# EAGLE board Trial_1_ECE411_Group_15_UPDATED (EAGLE 9.2.1)
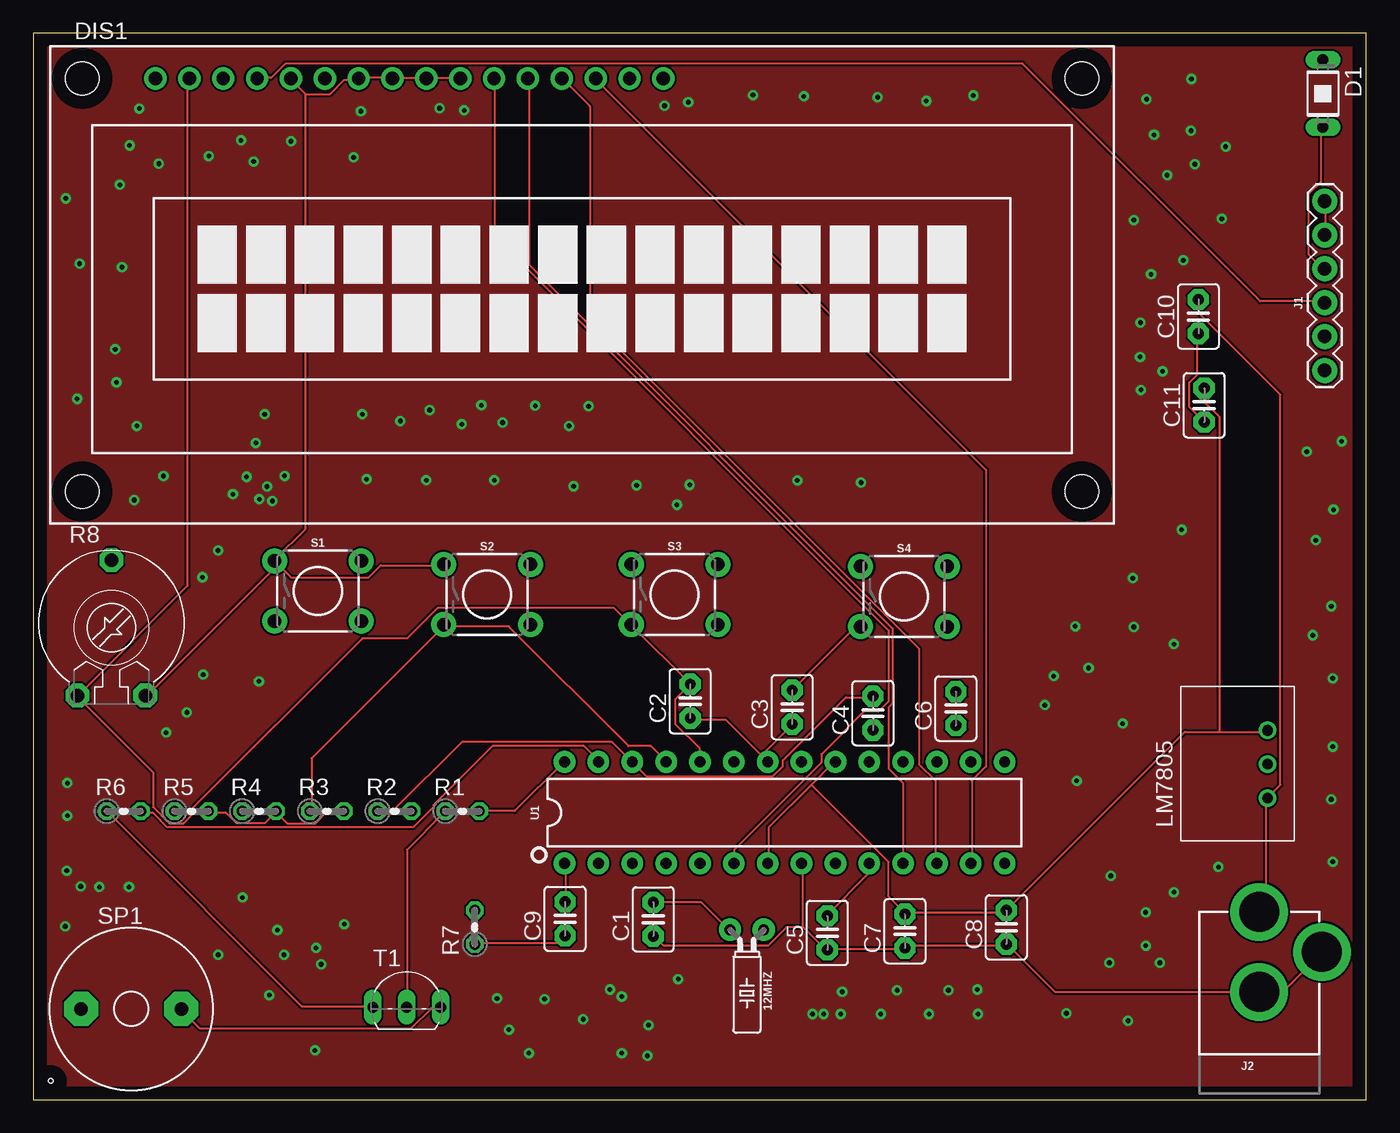
[diagram p0: board, top side]
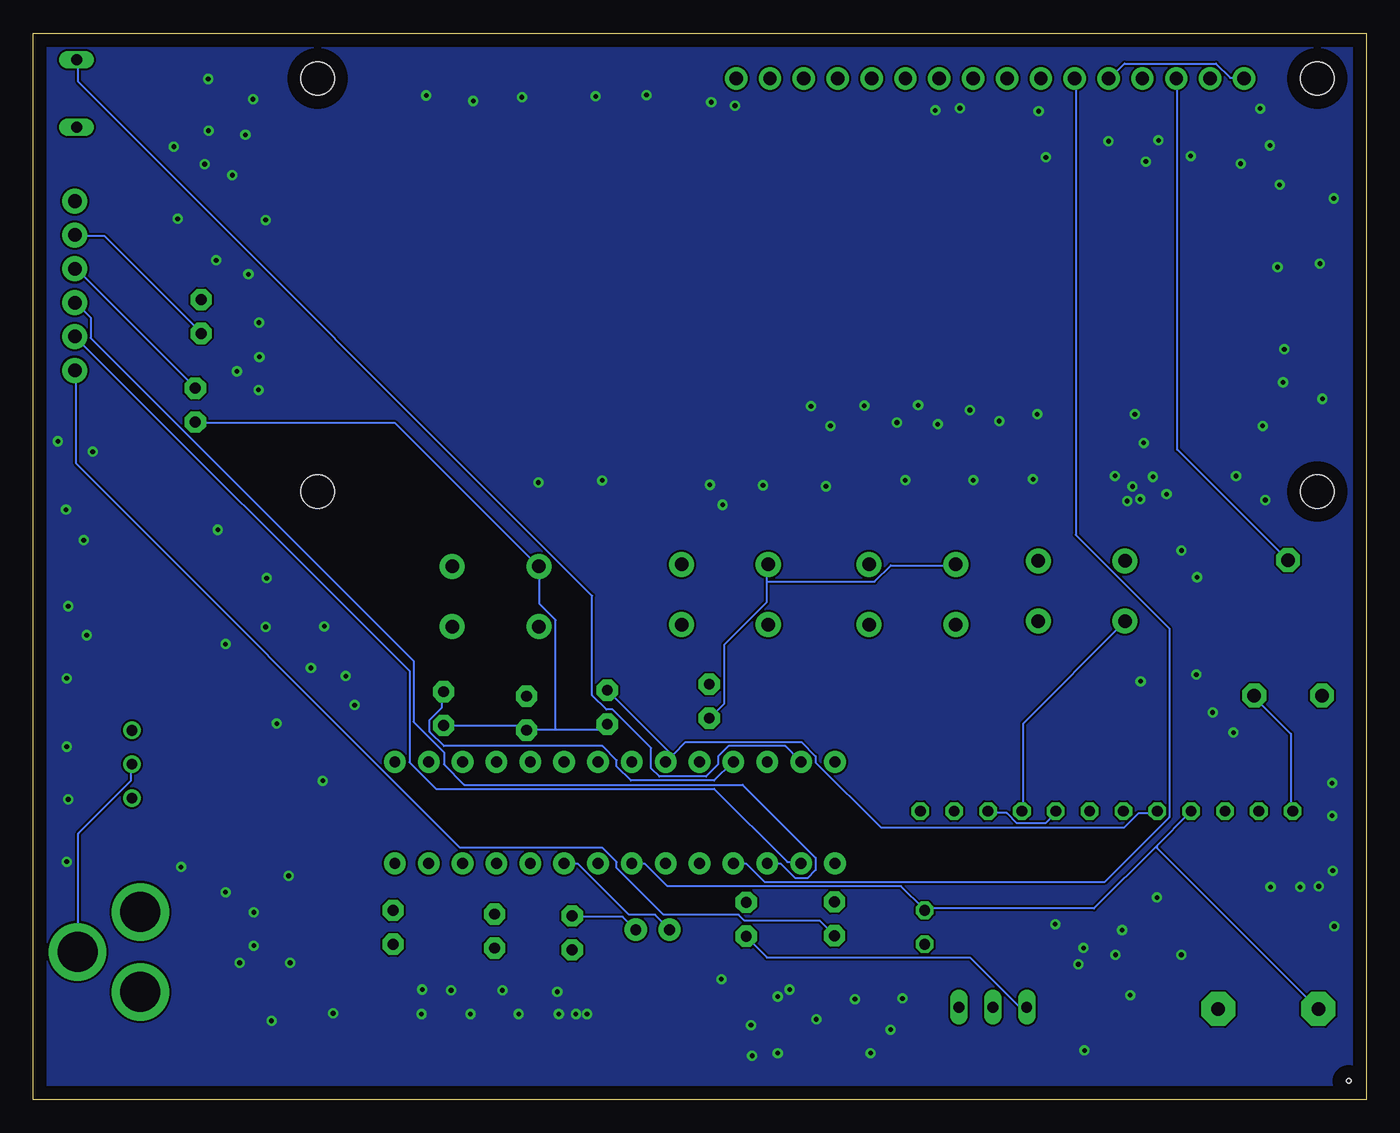
[diagram p1: board, bottom side, seen from below]

Size 100 x 80 mm. Coordinates in mm from the lower left corner, seen from the top.
Outline: 0,0 100,0 100,80 0,80 0,0
Copper layers (1*16): Top 0.035mm / dielectric 1.5mm / Bottom 0.035mm
Design rules "default": minimum track width 6mil, minimum drill 0.35mm, track to track 6mil, track to pad 6mil, pad to pad 6mil, via to via 6mil, smd to smd 6mil, copper to edge 40mil, drill to drill 6mil, minimum pad ring 10mil, minimum via ring 8mil, stop-mask expansion 4mil, vias tented up to drill 0mil, thermal gap 10mil
Holes 0.35 mm at 1.31,1.39

## Footprints (pad centres in the part's own frame; a part is rotated, then mirrored left to right if it is on the bottom)
CRYSTAL-PTH-2X6-CYL = drill 0.813 pad 1.676: 1 -1.27,0; 2 1.27,0
C2.5-3 = drill 0.813 pad 1.6 octagon: 1 -1.27,0; 2 1.27,0
BPW32 = drill 0.813 long: A 0,2.54; K 0,-2.54
TUXGR_16X2_R2 = drill 1 pad 1.676: 1 -32,15.5; 2 -29.46,15.5; 3 -26.92,15.5; 4 -24.38,15.5; 5 -21.84,15.5; 6 -19.3,15.5; 7 -16.76,15.5; 8 -14.22,15.5; 9 -11.68,15.5; 10 -9.14,15.5; 11 -6.6,15.5; 12 -4.06,15.5; 13 -1.52,15.5; 14 1.02,15.5; 15 3.56,15.5; 16 6.1,15.5 | hole 2.5: -37.5,-15.5; 37.5,-15.5; -37.5,15.5; 37.5,15.5
FTDI_BASIC = drill 1.016 pad 1.88: CTS 10.16,0; DTR 0,0; GND 12.7,0; RXI 2.54,0; TXO 5.08,0; VCC 7.62,0
POWER_JACK_PTH = drill 2.997 pad 4.318: GND 0,7.7; GNDBREAK 4.7,10.7; PWR 0,13.7
DC-DC_CONVERTER_78XX = drill 0.8: GND 0,0; VIN -2.54,0; VOUT 2.54,0
0204V = drill 0.813 octagon: 1 -1.27,0; 2 1.27,0
PT-10 = drill 1.016 pad 1.778 octagon: 1 -2.54,-5.08; 2 2.54,-5.08; 3 0,5.08
TACTILE_SWITCH_PTH_6.0MM = drill 1.016 pad 1.88: 1 -3.251,2.261; 2 3.251,2.261; 3 -3.251,-2.261; 4 3.251,-2.261
AL60P = drill 1.016 pad 2.54 octagon: 1 -3.759,0; 2 3.759,0
TO92-EBC-OVAL = drill 0.813 long: B 0,-1.27; C 2.54,-1.27; E -2.54,-1.27
DIP28 = drill 0.813 pad 1.626: 1 -16.51,-3.81; 2 -13.97,-3.81; 3 -11.43,-3.81; 4 -8.89,-3.81; 5 -6.35,-3.81; 6 -3.81,-3.81; 7 -1.27,-3.81; 8 1.27,-3.81; 9 3.81,-3.81; 10 6.35,-3.81; 11 8.89,-3.81; 12 11.43,-3.81; 13 13.97,-3.81; 14 16.51,-3.81; 15 16.51,3.81; 16 13.97,3.81; 17 11.43,3.81; 18 8.89,3.81; 19 6.35,3.81; 20 3.81,3.81; 21 1.27,3.81; 22 -1.27,3.81; 23 -3.81,3.81; 24 -6.35,3.81; 25 -8.89,3.81; 26 -11.43,3.81; 27 -13.97,3.81; 28 -16.51,3.81

## Placement (x,y rotation side)
12MHZ  [CRYSTAL-PTH-2X6-CYL]  53.54,12.74 180 top
C1  18p  [C2.5-3]  46.52,13.52 90 top
C2  100n  [C2.5-3]  49.28,29.89 90 top
C3  100n  [C2.5-3]  56.94,29.44 90 top
C4  100n  [C2.5-3]  63,28.99 90 top
C5  18p  [C2.5-3]  59.57,12.51 90 top
C6  100n  [C2.5-3]  69.22,29.34 90 top
C7  0.1u  [C2.5-3]  65.39,12.64 90 top
C8  0.1u  [C2.5-3]  73,12.92 90 top
C9  0.1u  [C2.5-3]  39.89,13.56 90 top
C10  0.1u  [C2.5-3]  87.41,58.75 90 top
C11  0.1u  [C2.5-3]  87.85,52.1 90 top
D1  BPW32  [BPW32]  96.75,75.48 180 top
DIS1  TUXGR_16X2_R2  [TUXGR_16X2_R2]  41.17,61.12 0 top
J1  6_PIN_SERIAL_CABLEPTH  [FTDI_BASIC]  96.89,54.71 90 top
J2  POWER_JACK  [POWER_JACK_PTH]  91.98,0.38 0 top
LM7805  R-78E5.0-1.0  [DC-DC_CONVERTER_78XX]  92.61,25.16 90 top
R1  220  [0204V]  32.18,21.63 0 top
R2  10k  [0204V]  27.1,21.63 0 top
R3  10k  [0204V]  22.02,21.63 0 top
R4  10k  [0204V]  16.94,21.63 0 top
R5  10k  [0204V]  11.86,21.63 0 top
R6  1k  [0204V]  6.78,21.63 0 top
R7  10k  [0204V]  33.12,12.92 90 top
R8  10k  [PT-10]  5.86,35.4 0 top
S1  MOMENTARY-SWITCH-SPST-PTH-6.0MM  [TACTILE_SWITCH_PTH_6.0MM]  21.35,38.16 0 top
S2  MOMENTARY-SWITCH-SPST-PTH-6.0MM  [TACTILE_SWITCH_PTH_6.0MM]  34.05,37.89 0 top
S3  MOMENTARY-SWITCH-SPST-PTH-6.0MM  [TACTILE_SWITCH_PTH_6.0MM]  48.11,37.89 0 top
S4  MOMENTARY-SWITCH-SPST-PTH-6.0MM  [TACTILE_SWITCH_PTH_6.0MM]  65.32,37.74 0 top
SP1  SPEAKER/AL60P  [AL60P]  7.34,6.8 0 top
T1  2N2222  [TO92-EBC-OVAL]  28.01,8.19 0 top
U1  328P  [DIP28]  56.37,21.53 0 top

## Library data of the parts
12MHZ = SparkFun-Clocks
C1-C11 = capacitor-wima
D1 = opto-trans-siemens; OC_FARNELL: unknown; OC_NEWARK: unknown
DIS1 = display-lcd; OC_FARNELL: unknown; OC_NEWARK: unknown
J1 = SparkFun-Connectors
J2 = SparkFun-Connectors; PROD_ID: CONN-08197
LM7805 = SparkFun-IC-Power; PROD_ID: COM-13655
R1-R7 = rcl; SPICEPREFIX: R
R8 = rcl; SPICEMODEL: POT; SPICEPREFIX: X
S1-S4 = SparkFun-Switches; PROD_ID: SWCH-08441; SF_SKU: COM-00097
SP1 T1 = adafruit
U1 = SparkFun-IC-Microcontroller; PROD_ID: IC-09136

## Nets
0: C1.1 C2.1 C3.1 C4.1 C5.1 C6.1 C7.1 C8.1 C10.1 C11.1 DIS1.1 DIS1.5 DIS1.7 DIS1.8 DIS1.9 DIS1.10 J1.CTS J1.GND J2.GND J2.GNDBREAK LM7805.GND R6.1 R8.2 S1.1 S2.1 S3.1 S4.1 T1.E U1.8 U1.22
ADC0: C3.2 R4.1 S4.3 U1.23
ADC1: C2.2 R5.1 S3.3 U1.24
ADC2: C6.2 R3.1 S2.3 U1.25
ADC3: C4.2 R2.1 S1.3 U1.26
N$1: 12MHZ.2 C1.2 U1.9
N$2: 12MHZ.1 C5.2 U1.10
N$3: SP1.2 T1.C
N$4: R1.1 T1.B
N$6: C10.2 J2.PWR LM7805.VIN
N$7: J1.RXI U1.2
N$9: DIS1.4 J1.TXO U1.3
N$11: DIS1.3 R8.3
N$13: DIS1.11 U1.6
N$14: DIS1.12 U1.11
N$15: DIS1.13 U1.12
N$16: DIS1.14 U1.13
N$17: D1.K R6.2 U1.27
N$18: R1.2 U1.28
N$20: C9.1 J1.DTR R7.1
N$23: DIS1.6 U1.4
N$24: C9.2 U1.1
VCC: C7.2 C8.2 C11.2 D1.A DIS1.2 J1.VCC LM7805.VOUT R2.2 R3.2 R4.2 R5.2 R7.2 R8.1 SP1.1 U1.7 U1.20

## Tracks (layer width: path | path; a pad name or v marks a point on that pad's centre or on a via)
0
  Top 0.152: J2.GNDBREAK 96.62,10.97 93.73,8.08 92.05,8.08 J2.GND 91.9,8.08 76.66,8.08 73.15,11.58 C8.1 73,11.58 65.68,11.58 65.53,11.43 C7.1 65.38,11.28 59.59,11.28 C5.1 59.44,11.28 57.76,12.95 | 57.76,12.95 57.76,17.68 U1.8 | 57.76,12.95 56.54,12.95 55.17,11.58 47.24,11.58 46.63,12.19 C1.1 | DIS1.10 32,76.66 29.57,76.66 DIS1.9 29.41,76.66 26.98,76.66 DIS1.8 26.82,76.66 24.54,76.66 DIS1.7 24.38,76.5 23.32,76.5 22.25,75.44 20.42,75.44 | 20.42,75.44 19.36,76.5 DIS1.5 | 18.29,40.23 18.14,40.39 S1.1 | 18.29,40.23 19.36,39.17 25.15,39.17 26.06,40.08 30.79,40.08 S2.1 | 18.29,40.23 18.29,40.08 8.53,30.33 R8.2 | 18.29,40.23 S1.1 | 20.42,75.44 20.42,42.82 18.14,40.54 S1.1 | J1.CTS 96.93,64.92 96.93,67.36 J1.GND | C10.1 87.33,57.45 87.33,54.41 86.72,53.8 86.72,51.97 87.78,50.9 C11.1 | 54.56,25.91 55.02,25.45 U1.22 54.56,25.91 | 54.56,25.91 51.97,28.5 49.38,28.5 C2.1 | 54.56,25.91 54.71,25.91 56.84,28.04 C3.1 | T1.E 25.45,7.01 20.12,7.01 5.64,21.49 R6.1
  Bottom 0.152: LM7805.GND 92.66,25.15 92.66,23.93 96.62,19.96 96.62,11.12 J2.GNDBREAK | T1.E 25.6,7.01 26.06,7.01 29.72,10.67 44.96,10.67 46.48,12.19 C1.1 | DIS1.1 9.3,76.66 10.21,76.66 11.28,77.72 18.14,77.72 19.2,76.66 DIS1.5 | R6.1 5.64,21.64 5.64,27.43 8.38,30.18 R8.2 | J1.CTS 96.77,64.77 94.64,64.77 87.48,57.61 C10.1 | 60.81,27.74 57.3,27.74 57,28.04 C3.1 | 60.81,27.74 62.94,27.74 C4.1 63.09,27.74 63.4,28.04 69.19,28.04 C6.1 | 44.96,38.86 44.96,37.34 48.16,34.14 48.16,29.72 49.23,28.65 C2.1 | 44.96,38.86 44.96,40.08 S3.1 | 60.81,27.74 60.81,35.97 62.03,37.19 62.03,39.93 S4.1 62.18,40.08 72.85,50.75 87.78,50.75 C11.1 | 44.96,38.86 36.88,38.86 35.66,40.08 30.94,40.08 S2.1
ADC0
  Top 0.152: S4.3 62.03,35.36 61.57,35.36 57,30.79 C3.2
  Bottom 0.152: 51.97,25.91 52.43,25.45 U1.23 | 51.97,25.91 51.05,26.82 42.37,26.82 41.3,25.76 41.3,25.3 36.42,20.42 18.14,20.42 17.07,21.49 15.7,21.49 R4.1 | 51.97,25.91 52.12,25.91 56.84,30.63 C3.2
ADC1
  Top 0.152: R5.1 10.67,21.64 11.73,21.64 24.69,34.59 28.04,34.59 30.33,36.88 43.59,36.88 44.81,35.66 S3.3 44.96,35.51 49.23,31.24 C2.2 49.23,31.09 48.16,30.02 48.16,28.19 49.99,26.36 49.99,25.45 U1.24
ADC2
  Top 0.152: R3.1 20.88,21.64 20.88,25.6 30.79,35.51 S2.3 30.94,35.51 35.66,35.51 44.65,26.52 46.33,26.52 47.4,25.45 U1.25
  Bottom 0.152: C6.2 69.34,30.48 69.34,29.41 70.26,28.5 70.26,27.58 69.19,26.52 57.3,26.52 56.24,25.45 56.24,24.99 55.17,23.93 48.92,23.93 47.55,25.3 U1.25
ADC3
  Top 0.152: C4.2 62.94,30.18 60.96,30.18 56.24,25.45 56.24,24.99 55.47,24.23 46.02,24.23 44.96,25.3 U1.26 44.81,25.45 43.43,26.82 32.16,26.82 26.98,21.64 25.91,21.64 R2.1
  Bottom 0.152: R2.1 25.76,21.64 25.76,28.19 18.14,35.81 S1.3
GND  (via drill 0.35)
  other vias: 27.53,50.91 32.14,50.67 35.21,50.79 29.73,51.73 33.61,52.1 37.66,52.06 40.19,50.54 41.66,52.02 29.48,46.47 34.58,46.47 40.53,46.01 45.25,46.09 48.28,44.62 49.25,46.12 17.35,51.42 16.69,49.27 15.99,46.72 14.98,45.42 17.93,44.91 9.77,46.79 7.76,50.54 6.24,53.81 3.28,52.57 6.14,56.29 6.65,62.46 3.47,62.71 2.43,67.61 6.49,68.63 7.22,71.59 7.95,74.35 9.42,70.22 13.17,70.79 15.58,71.97 19.33,71.9 16.53,70.38 24.03,70.7 24.57,74.16 30.48,74.38 32.33,74.22 47.36,74.57 49.14,74.83 54,75.37 57.81,75.27 66.99,74.92 63.34,75.21 70.52,75.34 83.52,75.05 84.09,72.38 86.88,76.58 86.85,72.7 85.07,69.36 87.14,70.19 82.56,65.99 89.17,66.09 89.46,71.49 86.28,62.97 83.87,61.92 83.07,58.3 83.04,55.72 84.72,54.64 83.1,53.24 86.15,42.75 82.5,39.12 78.17,35.51 76.56,31.77 82.57,35.45 81.74,28.21 85.58,34.17 95.99,34.84 96.21,41.97 95.55,48.61 98.16,49.39 97.55,44.26 97.38,37.01 97.49,31.61 97.49,26.48 97.38,22.52 97.49,17.84 88.92,17.45 85.58,15.55 83.46,14.05 83.46,11.54 82.13,5.91 80.73,10.26 84.52,10.26 77.5,6.47 70.88,6.41 67.2,6.41 63.58,6.41 60.58,6.41 59.3,6.41 58.46,6.41 60.69,8.08 64.81,8.19 68.65,8.19 70.82,8.25 80.84,16.78 78.28,23.91 75.89,29.6 79.17,32.39 57.32,46.46 62.11,46.29 46.16,5.58 41.26,6.02 34.8,7.58 35.69,5.24 38.36,7.53 43.26,8.25 48.38,9.03 21.6,10.15 23.33,13.16 21.21,11.37 18.31,12.71 15.7,15.16 7.18,15.94 3.56,16 2.56,21.29 2.56,23.75 2.5,17.17 2.39,12.99 4.95,15.94 9.96,27.54 11.52,29.04 16.92,31.38 12.75,31.88 12.69,39.19 13.86,41.19 7.57,44.98 25,46.54 24.68,51.42 18.84,46.79 17.54,45.99 16.96,45.05 17.7,7.83 13.87,10.86 18.81,10.86 21.13,3.68 37.18,3.48 44.15,3.48 44.15,7.72 46.07,3.28
  pour Top: -2.82,83.37 103.13,83.37 103.13,-1.66 -2.82,-1.66 -2.82,83.35
  pour Bottom: -3.18,84 104.69,84 104.69,-4.65 -3.2,-4.65 -3.2,84
N$1
  Top 0.152: C1.2 46.63,14.78 50.14,14.78 52.12,12.8 12MHZ.2
  Bottom 0.152: U1.9 60.05,17.68 59.13,17.68 55.32,13.87 53.34,13.87 52.27,12.8 12MHZ.2
N$2
  Top 0.152: U1.10 62.64,17.68 62.64,16.92 59.59,13.87 C5.2
  Bottom 0.152: C5.2 59.44,13.72 55.78,13.72 54.86,12.8 12MHZ.1
N$3
  Top 0.152: T1.C 30.48,6.86 29.87,6.86 28.35,5.33 12.5,5.33 11.12,6.71 SP1.2
N$4
  Top 0.152: T1.B 28.04,7.01 28.04,18.75 30.79,21.49 R1.1
N$6
  Top 0.152: J2.PWR 92.05,14.17 92.51,14.63 92.51,22.55 LM7805.VIN 92.66,22.71 93.57,23.62 93.57,52.88 87.48,58.98 87.48,59.89 C10.2
N$7
  Bottom 0.152: U1.2 42.52,17.83 43.43,17.83 48.92,23.32 69.8,23.32 71.78,25.3 71.78,32.16 96.77,57.15 J1.RXI
N$9
  Top 0.152: DIS1.4 16.92,76.66 17.83,76.66 18.9,77.72 74.22,77.72 92.05,59.89 96.77,59.89 J1.TXO
  Bottom 0.152: U1.3 44.81,17.68 43.89,17.68 42.82,16.61 41.91,16.61 41.3,17.22 41.3,18.14 46.79,23.62 67.67,23.62 69.19,25.15 69.19,26.06 71.48,28.35 71.48,32.92 95.71,57.15 95.71,58.67 96.77,59.74 J1.TXO
N$11
  Bottom 0.152: DIS1.3 14.17,76.5 14.17,48.77 5.94,40.54 R8.3
N$13
  Top 0.152: U1.6 52.58,17.83 52.58,18.75 59.13,25.3 59.13,25.91 62.33,29.11 63.4,29.11 64.16,29.87 64.16,35.2 34.59,64.77 34.59,76.5 DIS1.11
N$14
  Top 0.152: U1.11 65.23,17.83 65.23,23.77 64.16,24.84 64.16,29.41 64.47,29.72 64.47,35.36 37.19,62.64 37.19,76.5 DIS1.12
N$15
  Top 0.152: U1.12 67.67,17.83 67.67,23.93 66.45,25.15 66.45,33.83 41.76,58.52 41.76,74.52 39.78,76.5 DIS1.13
N$16
  Top 0.152: U1.13 70.41,17.83 70.41,23.93 71.48,24.99 71.48,47.24 42.22,76.5 DIS1.14
N$17
  Top 0.152: R6.2 8.08,21.49 8.99,21.49 10.06,20.42 28.5,20.42 30.02,21.95 30.02,22.1 34.44,26.52 41.3,26.52 42.37,25.45 U1.27
  Bottom 0.152: D1.K 96.62,77.88 96.62,76.35 58.06,37.8 58.06,30.33 57,29.26 56.54,29.26 53.65,26.36 53.65,24.84 53.03,24.23 49.53,24.23 48.62,25.15 48.62,25.76 47.85,26.52 43.59,26.52 42.52,25.45 U1.27
N$18
  Top 0.152: R1.2 33.53,21.64 36.12,21.64 39.78,25.3 U1.28
N$20
  Top 0.152: R7.1 33.22,11.73 39.32,11.73 39.78,12.19 C9.1
  Bottom 0.152: J1.DTR 96.77,54.56 96.77,47.7 67.97,18.9 57.3,18.9 56.24,17.83 56.24,17.37 52.73,13.87 47.09,13.87 46.63,13.41 41,13.41 39.93,12.34 C9.1
N$23
  Bottom 0.152: U1.4 47.4,17.68 46.48,17.68 45.11,16.31 19.66,16.31 14.78,21.18 14.78,35.36 21.79,42.37 21.79,76.5 DIS1.6
N$24
  Top 0.152: C9.2 39.93,14.94 39.93,17.68 U1.1
VCC
  Top 0.152: D1.A 96.62,72.85 96.62,68.89 95.71,67.97 95.71,63.4 96.77,62.33 J1.VCC | 58.37,23.62 60.05,25.3 U1.20 | 58.37,23.62 55.17,20.42 55.17,17.83 U1.7 | 89,27.58 86.41,27.58 73.15,14.33 C8.2 73,14.17 72.85,14.02 65.53,14.02 C7.2 65.38,14.02 64.16,15.24 64.16,17.83 58.37,23.62 | 89,27.58 92.51,27.58 LM7805.VOUT | 89,27.58 89,51.21 87.94,52.27 87.94,53.34 C11.2 | R3.2 23.16,21.49 21.95,21.49 21.18,20.73 19.05,20.73 18.29,21.49 R4.2 18.14,21.49 17.37,20.73 15.24,20.73 14.48,21.49 13.26,21.49 R5.2 13.11,21.49 12.04,21.49 11.28,20.73 10.21,20.73 8.99,21.95 8.99,24.54 3.35,30.18 R8.1 3.35,30.33 11.58,38.56 11.58,76.5 DIS1.2
  Bottom 0.152: C11.2 87.94,53.49 96.77,62.33 J1.VCC | 15.7,19.05 13.26,21.49 R5.2 | 15.7,19.05 20.42,14.33 33.07,14.33 R7.2 33.22,14.33 34.9,16 52.43,16 54.1,17.68 55.02,17.68 U1.7 | R2.2 28.35,21.49 26.98,21.49 26.21,20.73 24.08,20.73 23.32,21.49 R3.2 | 15.7,19.05 15.7,18.9 3.66,6.86 SP1.1